# EAGLE board AVRI2CIO (EAGLE 6.3)
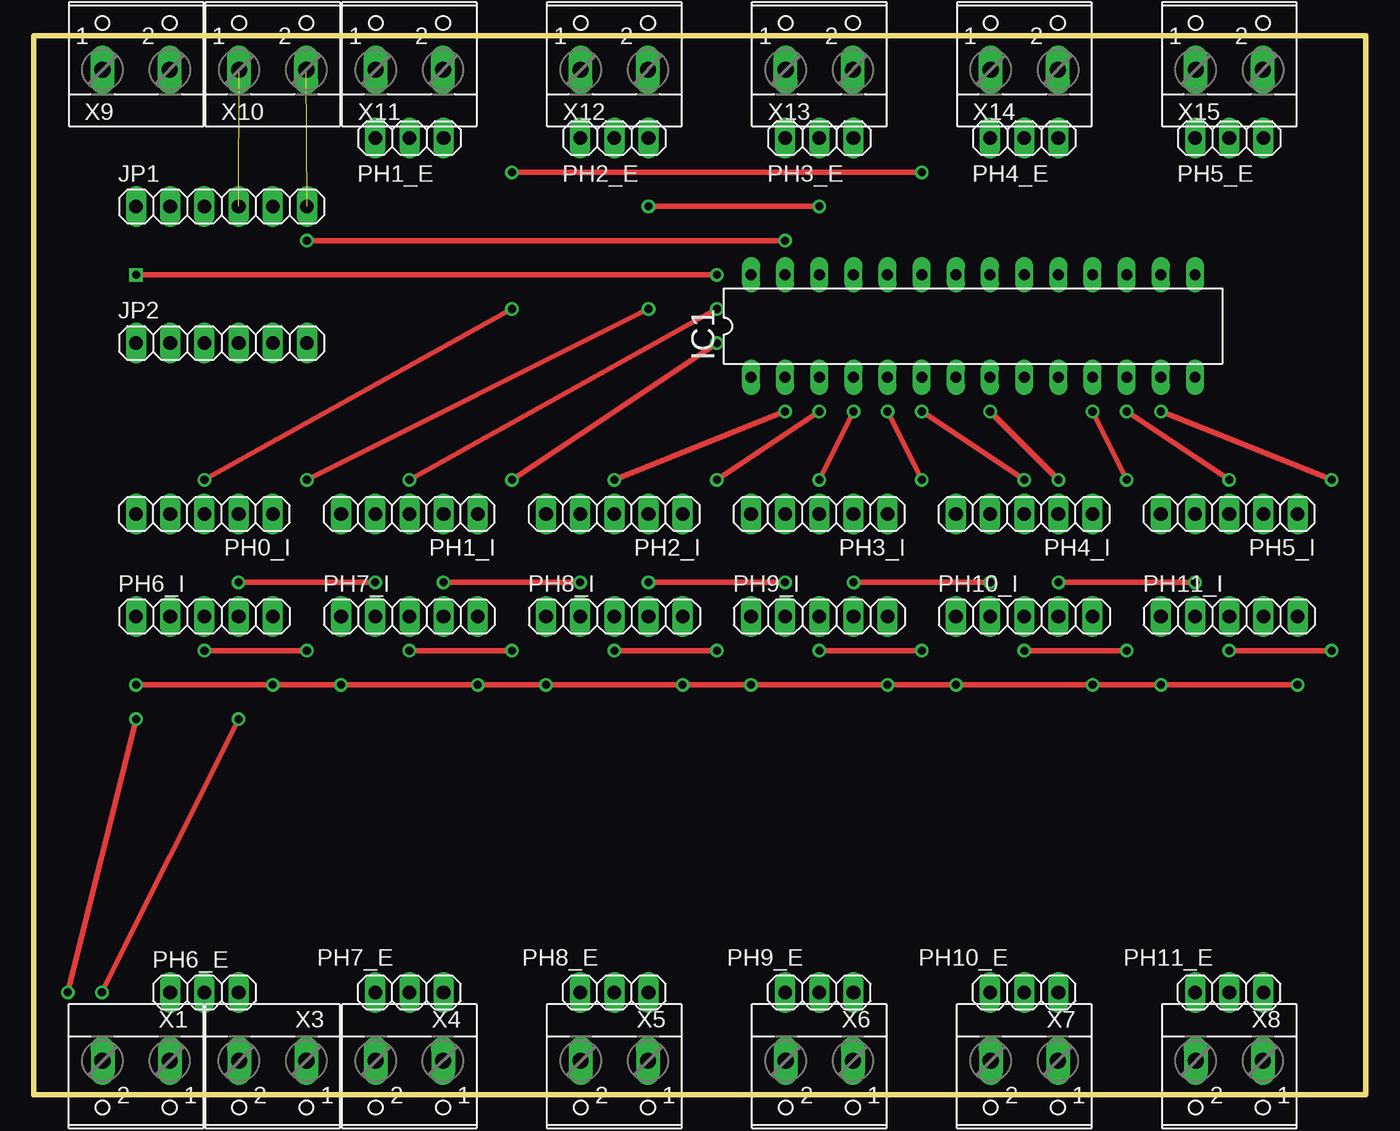
[diagram p0: board, top side]
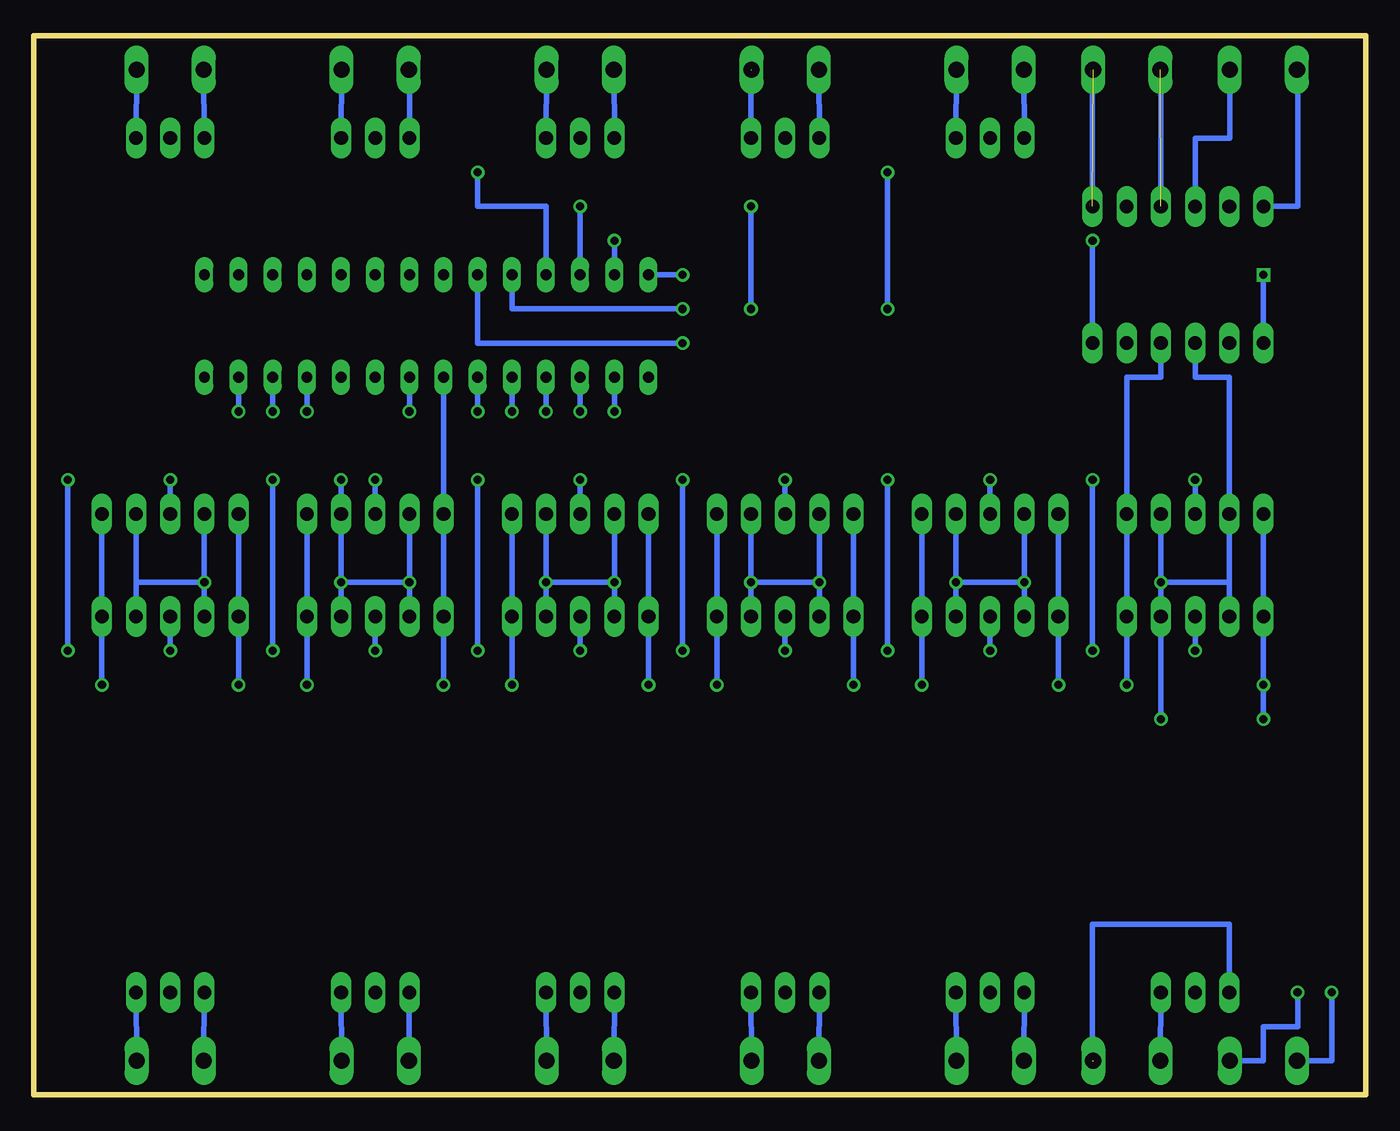
[diagram p1: board, bottom side, seen from below]

Size 99.06 x 78.74 mm. Coordinates in mm from the lower left corner, seen from the top.
Outline: 0,0 99.06,0 99.06,78.74 0,78.74 0,0
Copper layers (1*16): Top 0.035mm / dielectric 1.5mm / Bottom 0.035mm
Design rules "default": minimum track width 10mil, minimum drill 24mil, track to track 8mil, track to pad 8mil, pad to pad 8mil, via to via 8mil, smd to smd 8mil, copper to edge 40mil, drill to drill 8mil, minimum pad ring 10mil, minimum via ring 8mil, stop-mask expansion 4mil, vias tented up to drill 0mil, thermal gap 10mil

## Footprints (pad centres in the part's own frame; a part is rotated, then mirrored left to right if it is on the bottom)
DIL28-3 = drill 0.813 long: 1 -16.51,-3.81; 2 -13.97,-3.81; 3 -11.43,-3.81; 4 -8.89,-3.81; 5 -6.35,-3.81; 6 -3.81,-3.81; 7 -1.27,-3.81; 8 1.27,-3.81; 9 3.81,-3.81; 10 6.35,-3.81; 11 8.89,-3.81; 12 11.43,-3.81; 13 13.97,-3.81; 14 16.51,-3.81; 15 16.51,3.81; 16 13.97,3.81; 17 11.43,3.81; 18 8.89,3.81; 19 6.35,3.81; 20 3.81,3.81; 21 1.27,3.81; 22 -1.27,3.81; 23 -3.81,3.81; 24 -6.35,3.81; 25 -8.89,3.81; 26 -11.43,3.81; 27 -13.97,3.81; 28 -16.51,3.81
1X06 = drill 1.016 long: 1 -6.35,0; 2 -3.81,0; 3 -1.27,0; 4 1.27,0; 5 3.81,0; 6 6.35,0
1X05 = drill 1.016 long: 1 -5.08,0; 2 -2.54,0; 3 0,0; 4 2.54,0; 5 5.08,0
1X03 = drill 1.016 long: 1 -2.54,0; 2 0,0; 3 2.54,0
W237-102 = drill 1.194 long: 1 -2.5,-1.27; 2 2.5,-1.27

## Placement (x,y rotation side)
IC1  MEGA8-P  [DIL28-3]  69.85,57.15 0 top
JP1  [1X06]  13.97,66.04 0 top
JP2  [1X06]  13.97,55.88 0 top
PH0_I  [1X05]  12.7,43.18 180 top
PH1_E  [1X03]  27.94,71.12 0 top
PH1_I  [1X05]  27.94,43.18 180 top
PH2_E  [1X03]  43.18,71.12 0 top
PH2_I  [1X05]  43.18,43.18 180 top
PH3_E  [1X03]  58.42,71.12 0 top
PH3_I  [1X05]  58.42,43.18 180 top
PH4_E  [1X03]  73.66,71.12 0 top
PH4_I  [1X05]  73.66,43.18 180 top
PH5_E  [1X03]  88.9,71.12 0 top
PH5_I  [1X05]  88.9,43.18 180 top
PH6_E  [1X03]  12.7,7.62 0 top
PH6_I  [1X05]  12.7,35.56 0 top
PH7_E  [1X03]  27.94,7.62 180 top
PH7_I  [1X05]  27.94,35.56 0 top
PH8_E  [1X03]  43.18,7.62 180 top
PH8_I  [1X05]  43.18,35.56 0 top
PH9_E  [1X03]  58.42,7.62 180 top
PH9_I  [1X05]  58.42,35.56 0 top
PH10_E  [1X03]  73.66,7.62 180 top
PH10_I  [1X05]  73.66,35.56 0 top
PH11_E  [1X03]  88.9,7.62 180 top
PH11_I  [1X05]  88.9,35.56 0 top
X1  [W237-102]  7.62,1.27 180 top
X3  [W237-102]  17.78,1.27 180 top
X4  [W237-102]  27.94,1.27 180 top
X5  [W237-102]  43.18,1.27 180 top
X6  [W237-102]  58.42,1.27 180 top
X7  [W237-102]  73.66,1.27 180 top
X8  [W237-102]  88.9,1.27 180 top
X9  [W237-102]  7.62,77.47 0 top
X10  [W237-102]  17.78,77.47 0 top
X11  [W237-102]  27.94,77.47 0 top
X12  [W237-102]  43.18,77.47 0 top
X13  [W237-102]  58.42,77.47 0 top
X14  [W237-102]  73.66,77.47 0 top
X15  [W237-102]  88.9,77.47 0 top

## Library data of the parts
IC1 = atmel; OC_FARNELL: unknown; OC_NEWARK: unknown
JP1 JP2 PH0_I PH1_E PH1_I PH2_E PH2_I PH3_E PH3_I PH4_E PH4_I PH5_E PH5_I PH6_E PH6_I PH7_E PH7_I PH8_E PH8_I PH9_E PH9_I PH10_E PH10_I PH11_E PH11_I = pinhead
X1 X3-X15 = con-wago-500; MPN: 237-102; OC_FARNELL: unknown; OC_NEWARK: 70K9898

## Nets
+5V: IC1.7 JP2.4 PH0_I.1 PH0_I.5 PH1_I.1 PH1_I.5 PH2_I.1 PH2_I.5 PH3_I.1 PH3_I.5 PH4_I.1 PH4_I.5 PH5_I.1 PH5_I.5 PH6_I.1 PH6_I.5 PH7_I.1 PH7_I.5 PH8_I.1 PH8_I.5 PH9_I.1 PH9_I.5 PH10_I.1 PH10_I.5 PH11_I.1 PH11_I.5 X1.2
GND: IC1.8 JP2.3 PH0_I.2 PH0_I.4 PH1_I.2 PH1_I.4 PH2_I.2 PH2_I.4 PH3_I.2 PH3_I.4 PH4_I.2 PH4_I.4 PH5_I.2 PH5_I.4 PH6_I.2 PH6_I.4 PH7_I.2 PH7_I.4 PH8_I.2 PH8_I.4 PH9_I.2 PH9_I.4 PH10_I.2 PH10_I.4 PH11_I.2 PH11_I.4 X1.1
GND_LL: JP1.3 X9.2
IO1: IC1.9
IO13: IC1.10
N$3: PH6_E.3 X3.2
N$4: PH6_E.1 X3.1
N$5: PH7_E.3 X4.2
N$6: PH7_E.1 X4.1
N$7: PH8_E.3 X5.2
N$8: PH8_E.1 X5.1
N$9: PH9_E.3 X6.2
N$10: PH9_E.1 X6.1
N$11: PH10_E.3 X7.2
N$12: PH10_E.1 X7.1
N$13: PH11_E.3 X8.2
N$14: PH11_E.1 X8.1
N$15: IC1.22
N$16: IC1.21
N$19: PH1_E.1 X11.1
N$20: PH1_E.3 X11.2
N$23: PH2_E.1 X12.1
N$24: PH2_E.3 X12.2
N$25: PH3_E.1 X13.1
N$26: PH3_E.3 X13.2
N$27: PH4_E.1 X14.1
N$28: PH4_E.3 X14.2
N$29: PH5_E.1 X15.1
N$30: PH5_E.3 X15.2
N$31: IC1.20
PC0: IC1.23 PH7_I.3
PC1: IC1.24 PH1_I.3
PC2: IC1.25 PH0_I.3
PC3: IC1.26 PH6_I.3
PD0: IC1.2 PH2_I.3
PD1: IC1.3 PH8_I.3
PD2: IC1.4 PH3_I.3
PD3: IC1.5 PH9_I.3
PD4: IC1.6 PH4_I.3
PD5: IC1.11 PH10_I.3
PD6: IC1.12 PH5_I.3
PD7: IC1.13 PH11_I.3
SCL_HL: IC1.28 JP2.1
SCL_LL: JP1.6 X10.2
SDA_HL: IC1.27 JP2.6
SDA_LL: JP1.1 X9.1
VCC_LL: JP1.4 X10.1

## Tracks (layer width: path | path; a pad name or v marks a point on that pad's centre or on a via)
+5V  (via drill 0.6)
  Top 0.406: v7.62,30.48 v17.78,30.48 v22.86,30.48 v33.02,30.48 v38.1,30.48 v48.26,30.48 v53.34,30.48 v63.5,30.48 v68.58,30.48 v78.74,30.48 v83.82,30.48 v93.98,30.48 | v2.54,7.62 v7.62,27.94
  Bottom 0.406: PH9_I.5 63.5,40.64 | PH0_I.5 PH6_I.1 v7.62,30.48 v7.62,27.94 | v17.78,30.48 PH6_I.5 PH0_I.1 17.78,53.34 15.24,53.34 JP2.4 | PH9_I.1 PH3_I.5 v53.34,30.48 | PH9_I.5 PH3_I.1 v63.5,30.48 PH9_I.5 | PH4_I.5 PH10_I.1 | PH4_I.1 PH10_I.5 v78.74,30.48 | PH4_I.5 v68.58,30.48 | PH11_I.1 PH5_I.5 v83.82,30.48 | PH5_I.1 PH11_I.5 v93.98,30.48 | PH7_I.1 PH1_I.5 v22.86,30.48 | PH7_I.5 PH1_I.1 v33.02,30.48 | X1.2 2.54,2.54 v2.54,7.62 | IC1.7 PH4_I.5 | PH2_I.5 PH8_I.1 v38.1,30.48 PH2_I.5 | PH2_I.1 PH8_I.5 v48.26,30.48 PH2_I.1
GND  (via drill 0.6)
  Top 0.406: v15.24,38.1 v25.4,38.1 | v30.48,38.1 v40.64,38.1 | v45.72,38.1 v55.88,38.1 | v60.96,38.1 v71.12,38.1 | v76.2,38.1 v86.36,38.1 | v15.24,27.94 v5.08,7.62 | v71.12,50.8 v76.2,45.72
  Bottom 0.406: PH0_I.2 v15.24,38.1 | v15.24,38.1 10.16,38.1 | 10.16,38.1 PH6_I.2 | PH1_I.2 v30.48,38.1 | v30.48,38.1 v25.4,38.1 | v25.4,38.1 PH7_I.2 | PH3_I.2 v60.96,38.1 | v60.96,38.1 v55.88,38.1 | v55.88,38.1 PH9_I.2 | PH2_I.2 v45.72,38.1 | v45.72,38.1 v40.64,38.1 | v40.64,38.1 PH8_I.2 | v76.2,38.1 PH4_I.2 v76.2,45.72 | v76.2,38.1 v71.12,38.1 | v71.12,38.1 PH10_I.2 | PH5_I.2 91.44,38.1 | 91.44,38.1 v86.36,38.1 | v86.36,38.1 PH11_I.2 | PH10_I.4 v76.2,38.1 | PH8_I.4 v45.72,38.1 | PH7_I.4 v30.48,38.1 | PH9_I.4 v60.96,38.1 | PH11_I.4 91.44,38.1 | PH5_I.4 v86.36,38.1 | PH3_I.4 v55.88,38.1 | PH2_I.4 v40.64,38.1 | PH1_I.4 v25.4,38.1 | 10.16,38.1 PH0_I.4 10.16,53.34 12.7,53.34 JP2.3 | v15.24,38.1 PH6_I.4 v15.24,27.94 | PH4_I.4 v71.12,38.1 | X1.1 7.62,2.54 7.62,5.08 5.08,5.08 v5.08,7.62 | IC1.8 v71.12,50.8
GND_LL
  Bottom 0.406: X9.2 10.12,71.16 10.16,71.12 12.7,71.12 JP1.3
N$3
  Bottom 0.406: X3.2 PH6_E.3
N$4  (1 unrouted)
  Bottom 0.406: PH6_E.1 10.16,12.7 20.32,12.7 20.32,2.54
N$5
  Bottom 0.406: X4.2 PH7_E.3
N$6
  Bottom 0.406: X4.1 PH7_E.1
N$7
  Bottom 0.406: X5.2 PH8_E.3
N$8
  Bottom 0.406: X5.1 PH8_E.1
N$9
  Bottom 0.406: X6.2 PH9_E.3
N$10
  Bottom 0.406: X6.1 PH9_E.1
N$11
  Bottom 0.406: X7.2 PH10_E.3
N$12
  Bottom 0.406: X7.1 PH10_E.1
N$13
  Bottom 0.406: X8.2 PH11_E.3
N$14
  Bottom 0.406: X8.1 PH11_E.1
N$19
  Bottom 0.406: PH1_E.1 X11.1
N$20
  Bottom 0.406: PH1_E.3 X11.2
N$23
  Bottom 0.406: PH2_E.1 X12.1
N$24  (1 unrouted)
  Bottom 0.406: PH2_E.3 45.72,76.2
N$25
  Bottom 0.406: PH3_E.1 X13.1
N$26
  Bottom 0.406: PH3_E.3 X13.2
N$27
  Bottom 0.406: PH4_E.1 71.12,76.2 X14.1
N$28
  Bottom 0.406: PH4_E.3 X14.2
N$29
  Bottom 0.406: PH5_E.1 X15.1
N$30
  Bottom 0.406: PH5_E.3 X15.2
PC0  (via drill 0.6)
  Top 0.406: v27.94,33.02 v35.56,33.02 | v35.56,45.72 v50.8,55.88
  Bottom 0.406: PH7_I.3 v27.94,33.02 | v35.56,33.02 v35.56,45.72 | v50.8,55.88 66.04,55.88 IC1.23
PC1  (via drill 0.6)
  Top 0.406: v27.94,45.72 v50.8,58.42
  Bottom 0.406: PH1_I.3 v27.94,45.72 | v50.8,58.42 63.5,58.42 IC1.24
PC2  (via drill 0.6)
  Top 0.406: v12.7,45.72 v35.56,58.42 | v66.04,68.58 v35.56,68.58
  Bottom 0.406: PH0_I.3 v12.7,45.72 | IC1.25 60.96,66.04 66.04,66.04 v66.04,68.58 | v35.56,58.42 v35.56,68.58
PC3  (via drill 0.6)
  Top 0.406: v12.7,33.02 v20.32,33.02 | v20.32,45.72 v45.72,58.42 | v58.42,66.04 v45.72,66.04
  Bottom 0.406: PH6_I.3 v12.7,33.02 | v20.32,33.02 v20.32,45.72 | IC1.26 v58.42,66.04 | v45.72,58.42 v45.72,66.04
PD0  (via drill 0.6)
  Top 0.406: v55.88,50.8 v43.18,45.72
  Bottom 0.406: PH2_I.3 v43.18,45.72 | IC1.2 v55.88,50.8
PD1  (via drill 0.6)
  Top 0.406: v43.18,33.02 v50.8,33.02 | v50.8,45.72 v58.42,50.8
  Bottom 0.406: IC1.3 v58.42,50.8 | PH8_I.3 v43.18,33.02 | v50.8,33.02 v50.8,45.72
PD2  (via drill 0.6)
  Top 0.406: v58.42,45.72 v60.96,50.8
  Bottom 0.406: PH3_I.3 v58.42,45.72 | IC1.4 v60.96,50.8
PD3  (via drill 0.6)
  Top 0.406: v58.42,33.02 v66.04,33.02 | v66.04,45.72 v63.5,50.8
  Bottom 0.406: IC1.5 v63.5,50.8 | PH9_I.3 v58.42,33.02 | v66.04,33.02 v66.04,45.72
PD4  (via drill 0.6)
  Top 0.406: v66.04,50.8 v73.66,45.72
  Bottom 0.406: IC1.6 v66.04,50.8 | PH4_I.3 v73.66,45.72
PD5  (via drill 0.6)
  Top 0.406: v73.66,33.02 v81.28,33.02 | v81.28,45.72 v78.74,50.8
  Bottom 0.406: IC1.11 v78.74,50.8 | PH10_I.3 v73.66,33.02 | v81.28,33.02 v81.28,45.72
PD6  (via drill 0.6)
  Top 0.406: v81.28,50.8 v88.9,45.72
  Bottom 0.406: IC1.12 v81.28,50.8 | v88.9,45.72 PH5_I.3
PD7  (via drill 0.6)
  Top 0.406: v88.9,33.02 v96.52,33.02 | v96.52,45.72 v83.82,50.8
  Bottom 0.406: IC1.13 v83.82,50.8 | PH11_I.3 v88.9,33.02 | v96.52,33.02 v96.52,45.72
SCL_HL  (via drill 0.6)
  Top 0.406: v50.8,60.96 v7.62,60.96
  Bottom 0.406: IC1.28 v50.8,60.96 | JP2.1 v7.62,60.96
SCL_LL  (1 unrouted)
  Bottom 0.406: 20.32,76.2 JP1.6
SDA_HL  (via drill 0.6)
  Top 0.406: v20.32,63.5 v55.88,63.5
  Bottom 0.406: JP2.6 v20.32,63.5 | v55.88,63.5 IC1.27
SDA_LL
  Bottom 0.406: X9.1 5.08,76.2 5.08,66.04 JP1.1
VCC_LL  (1 unrouted)
  Bottom 0.406: 15.24,76.2 JP1.4